# Altium PCB Battery Circuit.PcbDoc
Units mil, origin at the board's own origin, x right, y up, seen from the top; angles counter-clockwise.
Board outline 1675 x 3127 mil, 2 copper layers (Top Layer, Bottom Layer); 22 components, 15 nets, 59 pads, 64 vias.
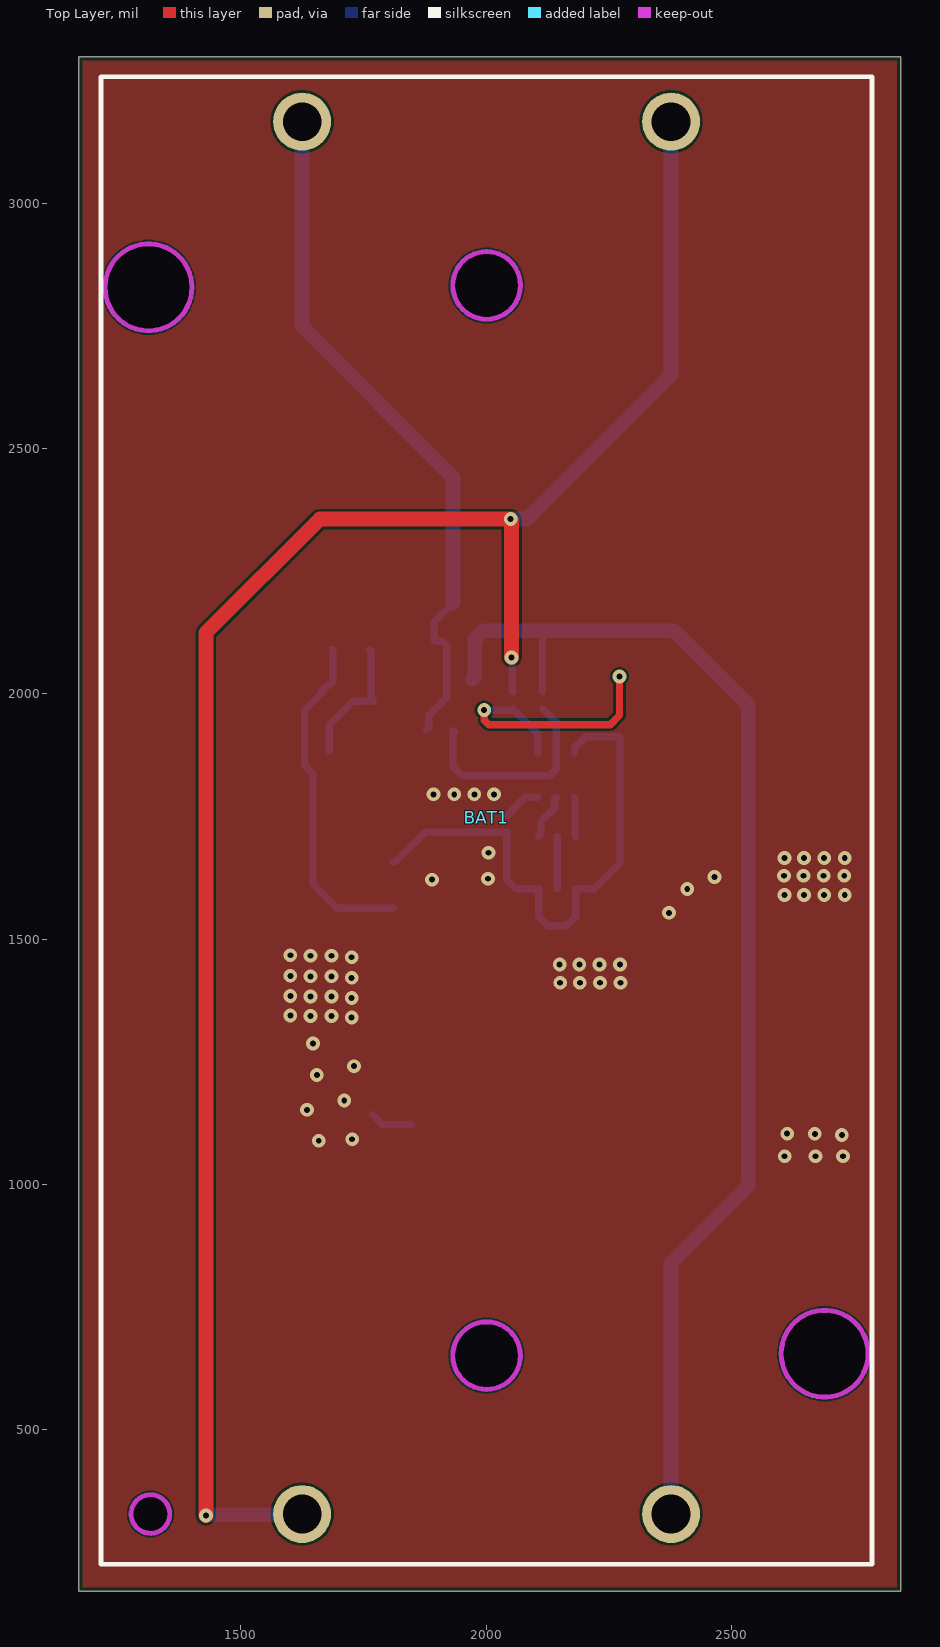
[diagram p0: Top Layer view]
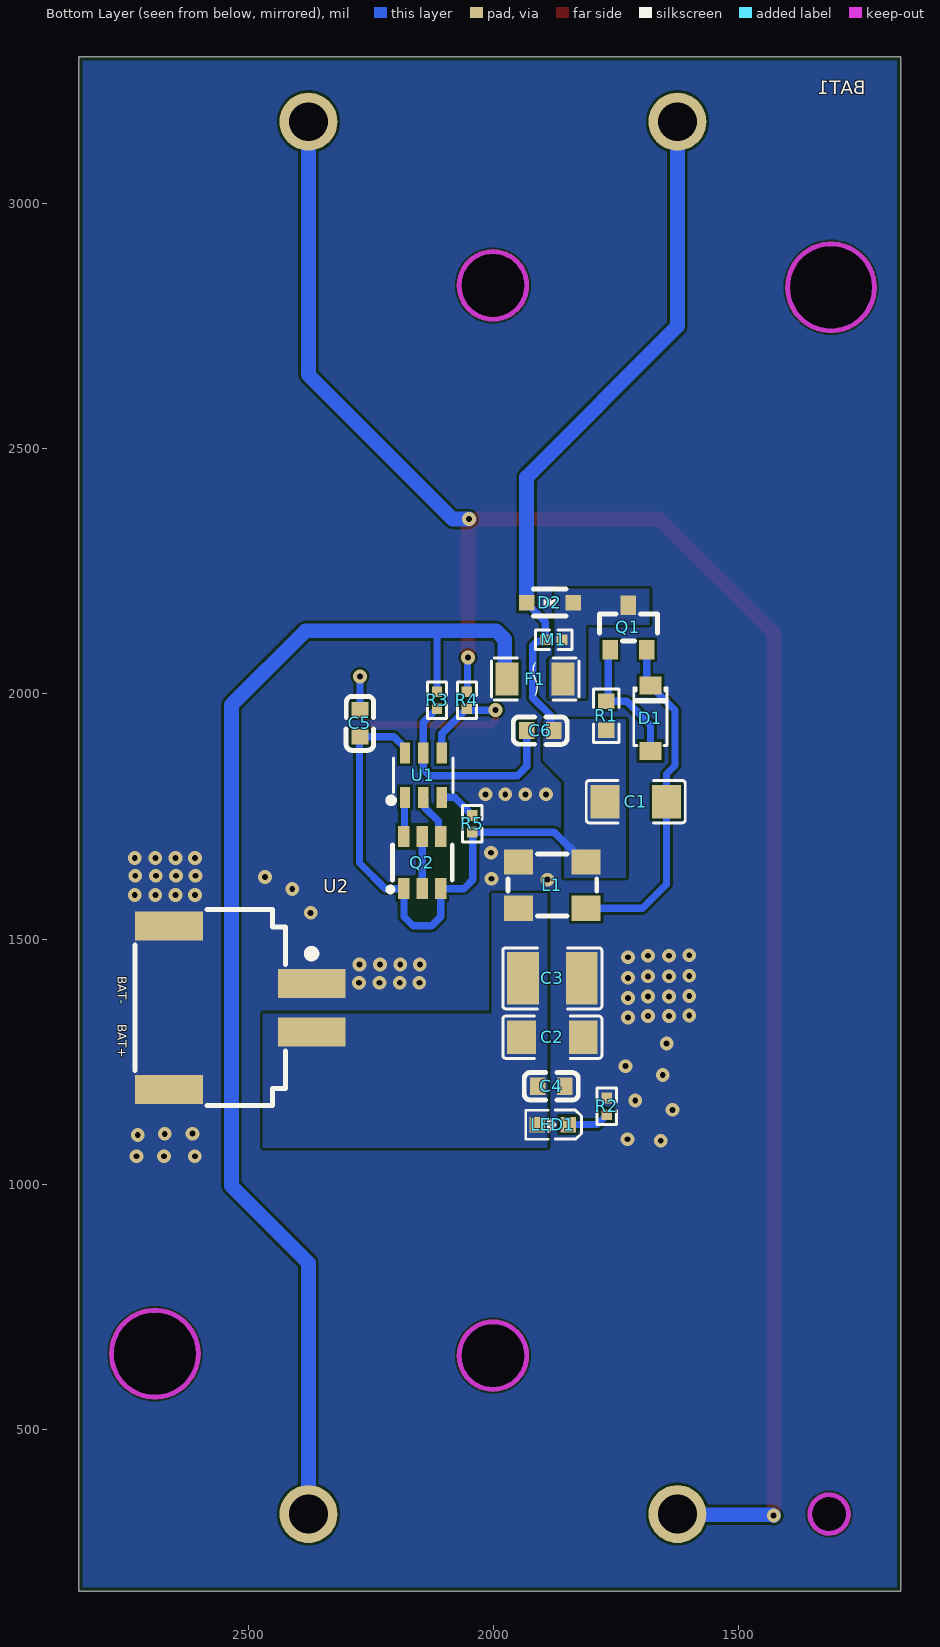
[diagram p1: Bottom Layer view, seen from below]

## Layer stack, top to bottom
Top Solder: solder mask 0.4, Solder Resist, Dk 3.5
Top Layer: signal copper 1.4
Dielectric 1: dielectric 12.6, FR-4, Dk 4.8
Bottom Layer: signal copper 1.4
Bottom Solder: solder mask 0.4, Solder Resist, Dk 3.5

## Board outline
1170,171 2845,171 2845,3298 1170,3298

## Design rules (kind name [scope] priority, off if disabled: settings)
BoardOutlineClearance [All] p1: gap=7.87 ignorepadtopadclearanceinfootprint=FALSE
Clearance [All] p1: gap=5 ignorepadtopadclearanceinfootprint=FALSE except(9.84: Arc-Hole Track-Hole SMDPad-Hole THPad-Hole Via-Hole Fill-Hole Poly-Hole Region-Hole Text-Hole)
ComponentClearance [All] p1: gap=5 collisioncheckmode=3 verticalgap=5 showdistances=TRUE
DiffPairsRouting [All] p1: maxlimit=10 minlimit=5 mostfreqgap=5 toplayer_minwidth=5 toplayer_maxwidth=1000 toplayer_prefwidth=5 bottomlayer_minwidth=5 bottomlayer_maxwidth=1000 bottomlayer_prefwidth=5 maxuncoupledlength=500
Height [All] p1: minheight=0 maxheight=71497.94 prefheight=500
HoleSize [All] p1: absolutevalues=TRUE maxlimit=248.03 minlimit=11.81 maxpercent=80.000 minpercent=20.000
HoleToHoleClearance [All] p1: gap=9.84 allowstackedmicrovias=FALSE
MinimumAnnularRing [All] p1: minimumring=3
MinimumSolderMaskSliver [All] p1: minsoldermaskwidth=0
PlaneClearance [All] p1: clearance=5
PlaneConnect PlaneConnectPowerPads [InPadClass('PowerPads')] p1: planeconnectstyle=Direct reliefexpansion=20 reliefentries=4 reliefconductorwidth=10 reliefairgap=10
PlaneConnect [All] p2: pad.planeconnectstyle=Relief pad.reliefexpansion=11.81 pad.reliefentries=4 pad.reliefconductorwidth=5 pad.reliefairgap=5 via.planeconnectstyle=Direct via.reliefexpansion=11.81 via.reliefentries=4 via.reliefconductorwidth=5 via.reliefairgap=5
PolygonConnect PolygonConnectPowerPads [All vs (InPadClass('PowerPads'))] p1: connectstyle=Direct reliefconductorwidth=10 reliefentries=4 polygonreliefangle="90 Angle" airgapwidth=10
PolygonConnect [All] p2: thpad.connectstyle=Direct thpad.reliefconductorwidth=5 thpad.reliefentries=4 thpad.polygonreliefangle="90 Angle" thpad.airgapwidth=5 smdpad.connectstyle=Relief smdpad.reliefconductorwidth=5 smdpad.reliefentries=4 smdpad.polygonreliefangle="90 Angle" smdpad.airgapwidth=5 via.connectstyle=Direct via.reliefconductorwidth=5 via.reliefentries=4 via.polygonreliefangle="90 Angle" via.airgapwidth=5
RoutingVias [All] p1: holewidth=11.81 width=23.62 viastyle="Through Hole" minholewidth=11.81 minwidth=23.62 maxholewidth=23.62 maxwidth=259.84
SilkToSilkClearance [All] p1: silktosilkclearance=0
SilkToSolderMaskClearance [IsPad] p1: minsilkscreentomaskgap=5 clearancetoexposedcopper=TRUE
SolderMaskExpansion [All] p1: expansion=2.95 istentingtop=FALSE
Width [All] p1: maxlimit=50 minlimit=5 preferedwidth=5
20 further rules are at their usual default settings.

## Components (designator, comment, footprint, x,y, rotation, side; value= is the part's Value field where it differs from the comment)
BAT1 "BH-18650-A1BJ021" "2 CELL BATTERY CASE" 2001,1747 r90 top
C1 "47uF" "47UF CAP" 1710,1780 r180 bottom
C2 "47uF" "47UF CAP" 1880,1300 r0 bottom
C3 "10uF" "10UF CAP" 1880,1420 r0 bottom
C4 "100nF" "100NF CAP" 1882.44,1200 r0 bottom
C5 "100nF" "100NF CAP" 2272,1940 r90 bottom
C6 "100nF" "100NF CAP" 1905,1925 r0 bottom
D1 "BZT52B6V8" "ZENER DIODE" 1680,1950 r270 bottom
D2 "SDD32C24L01" "ESD DIODE" 1885,2185 r180 bottom
F1 "C05228-000" FUSE_2 1915,2030 r180 bottom
L1 "CMF4532F-900-2P-Tms" "CMC FILTER" 1880,1610 r90 bottom
LED1 "XL-1608SURC-06" LED 1879.48,1121.87 r0 bottom
M1 "EZJP0V270EA" VARISTOR 1877.04,2110 r180 bottom
Q1 "AO3401A" "P MOS" 1725,2135 r270 bottom
Q2 "FS8205A" "2 N MOS" 2145,1656 r270 bottom
R1 "10R" "10R RES" 1770,1955 r90 bottom value=10Ω
R2 "330R" "330R RES" 1769,1159 r270 bottom value=330Ω
R3 "470R" "470R RES" 2115,1987.04 r90 bottom value=470Ω
R4 "470R" "470R RES" 2054,1987.04 r90 bottom value=470Ω
R5 "2K" "2K RES" 2043,1735 r90 bottom value=2kΩ
U1 "S-8252AAG-M6T1U" BMS 2142.87,1833.9 r180 bottom
U2 "BX-HA2.54-2PWT" "SMD JST 2P" 2515.67,1360.22 r270 bottom

## Footprints (in the part's own frame and the unit in brackets; to place one, negate y for a bottom-side part, rotate by r counter-clockwise, add the part's x,y. Pads: shape width x height; smd on the part's side, far side on the other; paste and mask are expansions set on the pad)
"2 CELL BATTERY CASE" [mm]
  round 3 hole 2: 1(-36.037,9.55) 2(-36.037,-9.55) 3(36.037,-9.55) 4(36.037,9.55)
  Keep-Out Layer board cut-out: -35.037,17.4 -35.136,17.834 -35.414,18.182 -35.815,18.375 -36.26,18.375 -36.661,18.182 -36.938,17.834 -37.037,17.4 -37.037,17.4 -36.903,16.9 -36.537,16.534 -36.037,16.4 -35.537,16.534 -35.171,16.9 -35.037,17.4
  Keep-Out Layer board cut-out: -25.487,-17.5 -25.792,-16.379 -26.615,-15.56 -27.737,-15.261 -28.859,-15.56 -29.682,-16.379 -29.987,-17.5 -29.987,-17.5 -29.682,-18.62 -28.859,-19.44 -27.737,-19.739 -26.616,-19.44 -25.792,-18.62 -25.487,-17.5
  Keep-Out Layer board cut-out: 29.712,17.5 29.407,18.62 28.584,19.44 27.462,19.739 26.34,19.44 25.517,18.62 25.212,17.5 25.212,17.5 25.517,16.38 26.34,15.56 27.462,15.261 28.584,15.56 29.407,16.379 29.712,17.5
  Keep-Out Layer board cut-out: -26.088,0 -26.261,0.759 -26.746,1.368 -27.448,1.706 -28.227,1.706 -28.929,1.368 -29.414,0.759 -29.588,0 -29.588,0 -29.414,-0.759 -28.929,-1.368 -28.227,-1.706 -27.448,-1.706 -26.746,-1.368 -26.261,-0.759 -26.088,0
  Keep-Out Layer board cut-out: 29.312,0 29.139,0.759 28.654,1.368 27.952,1.706 27.173,1.706 26.471,1.368 25.986,0.759 25.812,0 25.812,0 25.986,-0.759 26.471,-1.368 27.173,-1.706 27.952,-1.706 28.654,-1.368 29.139,-0.759 29.312,0
  Multi-Layer keep-out circle w0.254: c-36.037,17.4 r1
  Multi-Layer keep-out circle w0.254: c-27.737,-17.5 r2.25
  Multi-Layer keep-out circle w0.254: c27.462,17.5 r2.25
  Multi-Layer keep-out circle w0.254: c-27.838,0 r1.75
  Multi-Layer keep-out circle w0.254: c27.562,0 r1.75
  silkscreen extent -38.64,-19.95 38.36,19.95, body extent -42.71,-21.07 43.73,21.32, height 17.97
"2 N MOS" [mm]
  rect 1.1x0.6 smd paste+0 mask+0.051: 1(1.35,-0.95) 2(1.35,0) 3(1.35,0.95) 4(-1.35,0.95) 5(-1.35,0) 6(-1.35,-0.95)
  silkscreen extent -0.9,-1.78 1.52,1.55, body extent -1.27,-1.45 1.53,1.45, height 1.45
"2K RES" [mm]
  rect 0.566x0.54 smd paste-100 mask+0.051: 1(-0.433,0) 2(0.433,0)
  silkscreen extent -0.94,-0.5 0.94,0.5, body extent -0.5,-0.25 0.5,0.25, height 0.4
"10R RES" [mil]
  rect 31.75x34.02 smd paste-3937.01 mask+2: 1(-29.66,0) 2(29.66,0)
  silkscreen extent -55,-26 55,26, body extent -31,-16 31,16, height 22
"10UF CAP" [mm]
  rect 1.635x2.7 smd paste-100 mask+0.051: 1(-1.517,0) 2(1.517,0)
  silkscreen extent -2.56,-1.58 2.56,1.58, body extent -1.65,-1.3 1.75,1.3, height 1.5
"47UF CAP" [mm]
  rect 1.485x1.728 smd paste-100 mask+0.051: 1(-1.593,0) 2(1.593,0)
  silkscreen extent -2.56,-1.09 2.56,1.09, body extent -1.63,-0.8 1.57,0.8, height 0.81
"100NF CAP" [mm]
  rect 0.8x0.9 smd paste+0 mask+0.051: 1(-0.7,0) 2(0.7,0)
  silkscreen extent -1.41,-0.71 1.39,0.72, body extent -0.8,-0.4 0.8,0.4, height 0.9
"330R RES" [mm]
  rect 0.566x0.54 smd paste-100 mask+0.051: 1(-0.433,0) 2(0.433,0)
  silkscreen extent -0.94,-0.5 0.94,0.5, body extent -0.53,-0.22 0.47,0.28, height 0.4
"470R RES" [mm]
  rect 0.566x0.54 smd paste-100 mask+0.051: 1(-0.433,0) 2(0.433,0)
  silkscreen extent -0.94,-0.5 0.94,0.5, body extent -0.5,-0.25 0.5,0.25, height 0.4
BMS [mil]
  rect 20.95x42.2 smd paste+0 mask+2: 1(-37.4,-45.24) 2(0,-45.24) 3(37.4,-45.24) 4(37.4,45.24) 5(0,45.24) 6(-37.4,45.24)
  silkscreen extent -72,-57 61,35, body extent -57,-54 57,54, height 53
"CMC FILTER" [mm]
  rect 1.3x1.5 smd paste+0 mask+0.051: 1(-1.2,-1.75) 2(-1.2,1.75) 3(1.2,1.75) 4(1.2,-1.75)
  silkscreen extent -1.6,-2.3 1.6,2.3, body extent -1.63,-2.22 1.57,2.28, height 2.8
"ESD DIODE" [mm]
  rect 0.8x0.8 smd paste+0 mask+0.051: 1(-1.205,0) 2(1.205,0)
  silkscreen extent -0.86,-0.68 0.84,0.72, body extent -1.4,-0.75 1.45,0.75, height 1.16
FUSE_2 [mm]
  rect 1.19x1.728 smd paste+0 mask+0.051: 1(-1.445,0) 2(1.445,0)
  silkscreen extent -2.27,-1.09 2.27,1.09, body extent -1.6,-0.77 1.6,0.83, height 0.75
LED [mm]
  rect 0.8x0.8 smd paste+0 mask+0.051: 1(-0.8,-0.003) 2(0.8,0.003)
  silkscreen extent -1.49,-0.75 1.39,0.76, body extent -0.77,-0.37 0.83,0.43, height 0.8
"P MOS" [mm]
  rect 1x0.8 smd paste+0 mask+0.051: 1(1.15,-0.95) 2(1.15,0.95) 3(-1.15,0)
  silkscreen extent -0.7,-1.5 0.7,1.5, body extent -1.52,-1.6 1.47,1.5, height 1.25
"SMD JST 2P" [mm]
  rect 1.5x3.5 smd: 1(-1.25,3.7) 2(1.25,3.7) 3(4.23,-3.7) 4(-4.23,-3.7)
  silkscreen extent -5.07,-5.47 5.07,3.88, body extent -3.95,-5.28 3.95,3.32, height 5.5
VARISTOR [mm]
  rect 0.566x0.54 smd paste-100 mask+0.051: 1(-0.433,0) 2(0.433,0)
  silkscreen extent -0.94,-0.5 0.94,0.5, body extent -0.5,-0.25 0.5,0.25, height 0.4
"ZENER DIODE" [mm]
  rect 0.95x1.15 smd paste+0 mask+0.051: 1(-1.692,0) 2(1.692,0)
  silkscreen extent -1.58,-0.87 1.41,0.87, body extent -1.85,-0.75 1.8,0.8, height 1.43

## Part data
BAT1: library part "2 cell Battery Case", JLCPCB Part Class="Extended Part", LCSC Part Name="电池盒 适用电池:CR18650", Manufacturer=MYOUNG(美阳), Operating Temperature Range=-25℃~+85℃, Add into BOM=yes, Battery Type=CR18650, Connector Type="Battery box", Contact Plating=Nickel, Convert to PCB=yes, Datasheet=https://atta.szlcsc.com/upload/public/pdf/source/20240112/147D77B47FAFC966051AFF7CD950677D.pdf, Device=BH-18650-A1BJ021, Manufacturer Part=BH-18650-A1BJ021, Supplier=LCSC, Supplier Footprint=插件, Supplier Part=C20606804, Symbol=BH-18650-A1BJ021
C1 C2: library part "47uF Res", JLCPCB Part Class="Extended Part", LCSC Part Name="47uF ±20% 16V", Manufacturer=IHHEC(禾伸堂), Manufacturer Part=C1206B476M016T, Tolerance=±20%, Add into BOM=yes, Convert to PCB=yes, Datasheet=https://atta.szlcsc.com/upload/public/pdf/source/20190313/C374174_331C86E4A68CC9C732DA87186AAF7F8A.pdf, Device=C1206B476M016T, Supplier=LCSC, Supplier Footprint=1206, Supplier Part=C607993, Symbol=C1206B476M016T
C3: library part "10uF Cap", JLCPCB Part Class="Extended Part", LCSC Part Name="10uF ±10% 16V", Manufacturer=muRata(村田), Manufacturer Part=GRM32ER61C106KA12L, Tolerance=±10%, Add into BOM=yes, Convert to PCB=yes, Datasheet=https://atta.szlcsc.com/upload/public/pdf/source/20200305/C490387_23319AE8C154DEB24C505E6C82A8106A.pdf, Device=GRM32ER61C106KA12L, Supplier=LCSC, Supplier Footprint=1210, Supplier Part=C184907, Symbol=GRM32ER61C106KA12L
C4 C5 C6: library part "100nF Cap", JLCPCB Part Class="Extended Part", LCSC Part Name="100nF ±10% 16V", Manufacturer=muRata(村田), Manufacturer Part=GRM188R71C104KA01D, Tolerance=±10%, Add into BOM=yes, Convert to PCB=yes, Datasheet=https://atta.szlcsc.com/upload/public/pdf/source/20161108/1478586365848.pdf, Device=GRM188R71C104KA01D, Supplier=LCSC, Supplier Footprint=0603, Supplier Part=C45000, Symbol=GRM188R71C104KA01D
D1: library part "Zener Diode", JLCPCB Part Class="Extended Part", Manufacturer=FMS(美丽微), Power Dissipation=350mW, Reverse Leakage Current (Ir)=2uA@4V, Zener Voltage (Nom)=6.8V, Zener Voltage (Range)=6.66V~6.94V, Add into BOM=yes, Convert to PCB=yes, Datasheet=https://atta.szlcsc.com/upload/public/pdf/source/20180504/C213215_D8AFED6AF7B069D42DB4E73D6157B86A.pdf, Device=BZT52B6V8_C213147, Diode Configuration=Single, LCSC Part Name=BZT52B6V8, Manufacturer Part=BZT52B6V8, Supplier=LCSC, Supplier Footprint=SOD-123, Supplier Part=C213147, Symbol=BZT52B6V8, Zener Impedance (Zzt)=15Ω
D2: library part "ESD Diode", Breakdown Voltage=26.7V, JLCPCB Part Class="Extended Part", LCSC Part Name=双向ESD, Manufacturer=Brightking(君耀电子), Maximum Clamping Voltage=43V, Peak Pulse Current (Ipp)@10/1000us=1A, Reverse Stand-Off Voltage (Vrwm)=24V, Add into BOM=yes, Convert to PCB=yes, Datasheet=https://atta.szlcsc.com/upload/public/pdf/source/20181015/C313315_2E77C22BCD6B5C9557E0D87DB90BD0FE.pdf, Device=SDD32C24L01, Manufacturer Part=SDD32C24L01, Number of Lines=单路, polarity=Bi-Directional, Supplier=LCSC, Supplier Footprint=SOD-323, Supplier Part=C313315, Symbol=SDD32C24L01, Type=ESD
F1: library part Fuse_2, Breaking Capacity=45A, Current Rating=5A, JLCPCB Part Class="Extended Part", LCSC Part Name=贴片式保险丝, Manufacturer=Littelfuse(美国力特), Operating Temperature=-55℃~+125℃, Voltage Rating (DC)=32V, Add into BOM=yes, Convert to PCB=yes, Datasheet=https://atta.szlcsc.com/upload/public/pdf/source/20191009/C434710_3F89FEC5E8B25E469DD927D36E88D4C3.pdf, Device=C05228-000, Manufacturer Part=C05228-000, Supplier=LCSC, Supplier Footprint=1206, Supplier Part=C207129, Symbol=C05228-000, Type="SMD Fuse"
L1: library part "CMC Filter", Current Rating=2A, DC Resistance (DCR)=50mΩ, Impedance @ Frequency=90Ω@100MHz, JLCPCB Part Class="Extended Part", LCSC Part Name="两路 贴片共模滤波器 阻抗90Ω@100MHz", Manufacturer=EMTEK(兆欣), Operating Temperature=-40℃~+125℃, Voltage Rating - DC=50V, Withstanding Voltage=12.5V, Add into BOM=yes, Convert to PCB=yes, Datasheet=https://atta.szlcsc.com/upload/public/pdf/source/20190322/C252150_370767FB0BF4DE5D3F867A1ABBD704E0.pdf, Device=CMF4532F-900-2P-Tms, Manufacturer Part=CMF4532F-900-2P-Tms, Number of Lines=2, Supplier=LCSC, Supplier Footprint=SMD,4.5x3.2x2.8mm, Supplier Part=C252150, Symbol=CMF4532F-900-2P-TMS
LED1: library part Led, Color Temperature=-, Emitted Color=Red, Forward Current=25mA, JLCPCB Part Class="Extended Part", Lens Color=无色透明透镜, Manufacturer=XINGLIGHT(成兴光), Operating Temperature=-30℃~+85℃, Power Dissipation=55mW, Add into BOM=yes, Convert to PCB=yes, Datasheet=https://atta.szlcsc.com/upload/public/pdf/source/20221102/D860AFDD1CDB02C5A8064103A32707E2.pdf, Device=XL-1608SURC-06, Dominant Wavelength=617nm~621nm, LCSC Part Name=XL-1608SURC-06, Manufacturer Part=XL-1608SURC-06, Mounting Sytle="Positive post", Peak Wavelength=623nm, Supplier=LCSC, Supplier Footprint=0603, Supplier Part=C965799, Symbol=XL-1608SURC-06, Viewing Angle=120°
M1: library part Varistor, JLCPCB Part Class="Extended Part", Manufacturer=PANASONIC(松下), Contributor=LCSC, Manufacturer Part=EZJP0V270EA, spicePre=R, spiceSymbolName=EZJP0V270EA, Supplier=LCSC, Supplier Part=C336822
Q1: library part "P Mos", Drain Source On Resistance (RDS(on)@Vgs,Id)=44mΩ@10V,4.3A, Gate Threshold Voltage (Vgs(th)@Id)=1.3V@250uA, Input Capacitance (Ciss@Vds)=1.2nF@15V, JLCPCB Part Class="Basic Part", LCSC Part Name="1个P沟道 耐压:30V 电流:4A", Manufacturer=AOS, Operating Temperature=-55℃~+150℃@(Tj), Add into BOM=yes, Convert to PCB=yes, Datasheet=https://atta.szlcsc.com/upload/public/pdf/source/20160507/1462613609053.pdf, Device=AO3401A_C15127, Manufacturer Part=AO3401A, Supplier=LCSC, Supplier Footprint=SOT-23, Supplier Part=C15127, Symbol=AO3401A, Total Gate Charge (Qg@Vgs)=12.2nC@4.5V, Type=1个PChannel
Q2: library part "2 N Mos", Drain Source On Resistance (RDS(on)@Vgs,Id)=19.5mΩ@4.5V,3A, Gate Threshold Voltage (Vgs(th)@Id)=700mV@250uA, Input Capacitance (Ciss@Vds)=466pF@10V, JLCPCB Part Class="Extended Part", LCSC Part Name="2个N沟道 耐压:20V 电流:6A", Manufacturer="TECH PUBLIC(台舟)", Operating Temperature=-55℃~+150℃@(Tj), Reverse Transfer Capacitance (Crss@Vds)=58pF@10V, Add into BOM=yes, Convert to PCB=yes, Datasheet=https://atta.szlcsc.com/upload/public/pdf/source/20210810/F53B6D4E8755A1F8E11BAF814CE98E6A.pdf, Device=FS8205A_C2830320, Manufacturer Part=FS8205A, Supplier=LCSC, Supplier Footprint=SOT-23-6, Supplier Part=C2830320, Symbol=FS8205A_C2830320, Total Gate Charge (Qg@Vgs)=5.7nC@10V, Type="2 N-Channel"
R1: library part "10R Res", JLCPCB Part Class="Extended Part", LCSC Part Name="厚膜电阻 10Ω ±5% 100mW", Manufacturer=FH(风华), Manufacturer Part=RS-03K100JT, Operating Temperature Range=-55℃~+155℃, Temperature Coefficient=±100ppm/℃, Tolerance=±5%, Add into BOM=yes, Convert to PCB=yes, Datasheet=https://atta.szlcsc.com/upload/public/pdf/source/20190505/C118335_36085569433BA7FFC796E569DBFE3139.pdf, Device=RS-03K100JT, Supplier=LCSC, Supplier Footprint=0603, Supplier Part=C304686, Symbol=RS-03K100JT, Type="Thick Film Resistors"
R2: library part "330R Res", JLCPCB Part Class="Extended Part", LCSC Part Name="330Ω ±1% 200mW 厚膜电阻", Manufacturer=PANASONIC(松下), Manufacturer Part=ERJPA2F3300X, Operating Temperature Range=-55℃~+155℃, Overload Voltage (Max)=-, Temperature Coefficient=±100ppm/℃, Tolerance=±1%, Add into BOM=yes, Convert to PCB=yes, Device=ERJPA2F3300X, Supplier=LCSC, Supplier Footprint=0402, Supplier Part=C427237, Symbol=ERJPA2F3300X, Type="Thick Film Resistors"
R3 R4: library part "470R Res", JLCPCB Part Class="Extended Part", LCSC Part Name="厚膜电阻 470Ω ±1% 62.5mW", Manufacturer=LIZ(丽智电子), Manufacturer Part=CR0402FF4700G, Operating Temperature Range=-55℃~+125℃, Temperature Coefficient=±200ppm/℃, Tolerance=±1%, Add into BOM=yes, Convert to PCB=yes, Datasheet=https://atta.szlcsc.com/upload/public/pdf/source/20180403/C189438_6D658388CC7843F35BBC9018D03F0B8E.pdf, Device=CR0402FF4700G, Supplier=LCSC, Supplier Footprint=0402, Supplier Part=C100443, Symbol=CR0402FF4700G, Type="Thick Film Resistors"
R5: library part "2K Res", JLCPCB Part Class="Extended Part", LCSC Part Name="厚膜电阻 2kΩ ±1% 62.5mW", Manufacturer=FH(风华), Manufacturer Part=RC-02W2001FT, Operating Temperature Range=-55℃~+155℃, Temperature Coefficient=±200ppm/℃, Tolerance=±1%, Add into BOM=yes, Convert to PCB=yes, Datasheet=https://atta.szlcsc.com/upload/public/pdf/source/20190505/C118335_36085569433BA7FFC796E569DBFE3139.pdf, Device=RC-02W2001FT, Supplier=LCSC, Supplier Footprint=0402, Supplier Part=C304583, Symbol=RC-02W2001FT, Type="Thick Film Resistors"
U1: library part BMS, JLCPCB Part Class="Extended Part", Manufacturer=ABLIC(艾普凌科), Operating Temperature=-40℃~+85℃, Add into BOM=yes, Convert to PCB=yes, Datasheet=https://atta.szlcsc.com/upload/public/pdf/source/20191209/C468225_F5C4BE1FF1893F617C569592E38D23FF.pdf, Device=S-8252AAG-M6T1U, LCSC Part Name=S-8252AAG-M6T1U, Manufacturer Part=S-8252AAG-M6T1U, Number of Cells=2, Supplier=LCSC, Supplier Footprint=SOT-23-6, Supplier Part=C468221, Symbol=S-8252AAG-M6T1U, The Chip Type=电池保护芯片, Type of Battery=锂离子/Polymer
U2: library part "SMD JST", Current Rating (Max)=3A, JLCPCB Part Class="Extended Part", LCSC Part Name="1x2P 间距:2.54mm 卧贴", Manufacturer=Bossie(博锡), Operating Temperature Range=-25℃~+85℃, Add into BOM=yes, Contact Material=Brass, Contact Plating=Tin, Convert to PCB=yes, Datasheet=https://atta.szlcsc.com/upload/public/pdf/source/20231017/0F5BE3E474C97FE56F69CCCD4551F1BC.pdf, Device=BX-HA2.54-2PWT, Manufacturer Part=BX-HA2.54-2PWT, Mounting Style=卧贴, Number of Pins=2P, Number of PINs Per Row=2, Number of Rows=1, Pins Structure=1x2P, Pitch=2.54mm, Reference Series=-, Row Spacing=-, Supplier=LCSC, Supplier Footprint=SMD,P=2.54mm,卧贴, Supplier Part=C18077806, Symbol=BX-HA2.54-2PWT

## Via types
v1: diameter 28, hole 12, Top Layer to Bottom Layer, 64 vias

## Nets (pads, with @x,y where several pads share a name; then routed paths per layer and width w, separated by ;. In a path a pad name is that pad's centre, name@x,y a point inside that pad or via, vN(x,y) a via of type N, cw(c..) or ccw(c..) an arc to the next point about the centre after c; other vN are vias at no path point)
BAT+: C2.2 C3.2 C4.2 L1.2 LED1.2 U2.2
Cell_1_N: BAT1.1 BAT1.3 R4.2 | length 4028.8
  Top Layer w30: v1(1429,325) 1429,2124 1661,2356 v1(2050,2356) ; v1(2052,2074) v1@2052,2354
  Bottom Layer w15: v1(2052,2074) 2053,2073 2053,2005.08 R4.2
  Bottom Layer w30: v1(1429,325) 1430.6,326.6 1623.41,326.6 BAT1.1 ; v1(2050,2356) 2083,2356 2376.98,2649.99 BAT1.3
Cell_1_P: BAT1.2 F1.1 R3.2 | length 2540.1
  Bottom Layer w15: R3.2 2115,2120.88
  Bottom Layer w30: F1.1 1977,2035.11 1977,2110.49 1994.57,2128.06 2382.94,2128.06 2534,1977 2534,997 2376.98,839.99 BAT1.2
Cell_2_N: BAT1.4 C1.1 C5.1 C6.1 D2.1 L1.4 M1.1 Q2.1 Q2.3 R1.1 R5.1 U1.6 | length 2534.9
  Bottom Layer w15: L1.4 1815.04,1657.24 1875.76,1717.96 R5.1 2042,1716.96 2042,1621 2060.15,1602.85 Q2.3 2107.6,1545.4 2126,1527 2164,1527 2182.4,1545.4 Q2.1 2220.85,1602.85 2273,1655 2273,1911.44 C5.1 2202.94,1912.44 2180.27,1889.77 U1.6 ; C6.1 1882.86,1930.42 1882.86,1954.86 1920,1992 1920,2098.08 1911.21,2106.87 1897.21,2106.87 M1.1 1894.08,2146.64 D2.1
  Bottom Layer w30: BAT1.4 1625.01,2748.99 1932.44,2441.56 D2.1
GND: C2.1 C3.1 C4.1 L1.3 R2.1 U2.1 U2.3 U2.4
  other v1: 2608.55,1057.48 2671.55,1057.48 2727.55,1057.48 1659,1089 1727,1092 2725.01,1100.82 2613.55,1103.48 2670,1103 1635,1152 1711,1171 1655,1223 1731,1241 1647,1287 1726,1340 1642,1343 1685,1343 1601,1344 1726,1380 1642,1383 1685,1383 1601,1384 2151,1411 2191,1411 2232,1411 2274,1411 1726,1421 1642,1424 1685,1424 1601,1425 2150,1448 2190,1448 2231,1448 2273,1448 1726,1463 1642,1466 1685,1466 1601,1467 2372.55,1553.48 2608,1590 2648,1590 2689,1590 2731,1590 2410,1602 1890,1621 2004,1623 2465.55,1626.48 2607,1629 2647,1629 2688,1629 2730,1629 2608,1665 2648,1665 2689,1665 2731,1665 2005,1676 1893,1795 1935,1795 1976,1795 2016,1795
NetC1_2: C1.2 D1.1 L1.1 Q1.2 | length 695.4
  Bottom Layer w15: Q1.2 1687.6,2024.23 D1.1 1676.06,2016.63 1664.86,2005.43 1664.86,2001.49 1630,1966.63 1630,1853.82 1647.3,1836.52 C1.2 1647.3,1611.7 1696.24,1562.76 L1.1
NetC5_2: C5.2 R4.1 U1.4 | length 627
  Top Layer w15: v1(1996,1967) 1996.41,1966.59 1996.41,1945.79 2005.19,1937 2253.1,1937 2272,1955.9 v1(2272,2035)
  Bottom Layer w15: v1(1996,1967) 1996.64,1966.36 2050.87,1966.36 R4.1@2054,1969.49 ; R4.1 R4.1@2054,1969.49 ; U1.4 2105.47,1918.53 2057.64,1966.36 2057.13,1966.36 R4.1@2054,1969.49 ; C5.2 v1(2272,2035)
NetC6_2: C6.2 R3.1 U1.5 | length 436.5
  Bottom Layer w15: C6.2@1935.06,1922.5 C6.2 1932,1924.44 1932,1852 1951,1833 2130,1833 2142.87,1845.87 U1.5 2142.87,1941.62 2115,1969.49 R3.1
NetD1_2: D1.2 Q1.1 R1.2 | length 271
  Bottom Layer w15: D1.2 1680,1936 1728.66,1984.66 R1.2 1766.2,1988.46 1766.2,2085.93 Q1.1
NetD2_2: D2.2 F1.2 M1.2 Q1.3
NetLED1_1: LED1.1 R2.2 | length 87.6
  Bottom Layer w15: R2.2 1769,1141.45 1788.45,1122 LED1.1
NetQ2_2: Q2.2 Q2.5 | length 106.3
  Bottom Layer w15: Q2.2 Q2.5
NetQ2_4: Q2.4 U1.2 | length 94.1
  Bottom Layer w15: Q2.4 2111.91,1713.46 2111.91,1739.91 2139.9,1767.9 2139.9,1785.68 U1.2
NetQ2_6: Q2.6 U1.1 | length 80.4
  Bottom Layer w15: U1.1 2181.34,1787.59 2181.34,1710.21 Q2.6
NetR5_2: R5.2 U1.3 | length 77.9
  Bottom Layer w15: R5.2 2043,1752.55 2079.11,1788.66 U1.3

## Polygon pours and split planes (outlines as drawn)
GND on Bottom Layer "NONET_L-01_P-001" (solid, remove dead copper, pour order 6): 1170,3298 2850,3298 2850,171 1170,171
NetD2_2 on Bottom Layer "NONET_L-01_P-001" (solid, remove dead copper, pour order 5): 1886.54,1990.98 1886.52,1991 1812,1991 1812,2141 1682,2141 1682,2214 1875,2214 1875,2072 1883.55,2072 1886.54,2069.02
Cell_2_N on Bottom Layer "NONET_L-01_P-001" (solid, remove dead copper, pour order 4): 1898.19,1947.72 1897.9,1948 1730,1948 1730,1625 1856,1625 1856,1821 1898,1863
BAT+ on Bottom Layer "NONET_L-01_P-001" (solid, remove dead copper, pour order 0): 2003,1593 1890,1593 1890,1075 2470,1075 2470,1348 2003,1348
GND on Top Layer "NONET_L-01_P-001" (solid, remove dead copper, pour order 8): 1170,3298 2845,3298 2845,171 1170,171

## Silkscreen, mask and mechanical layers (free items; w line width, h text height)
Bottom Overlay:
  text "BAT-     BAT+" at 2772,1424 h30 r90